# EAGLE board max1551_charger_v1 (EAGLE 8.4.2)
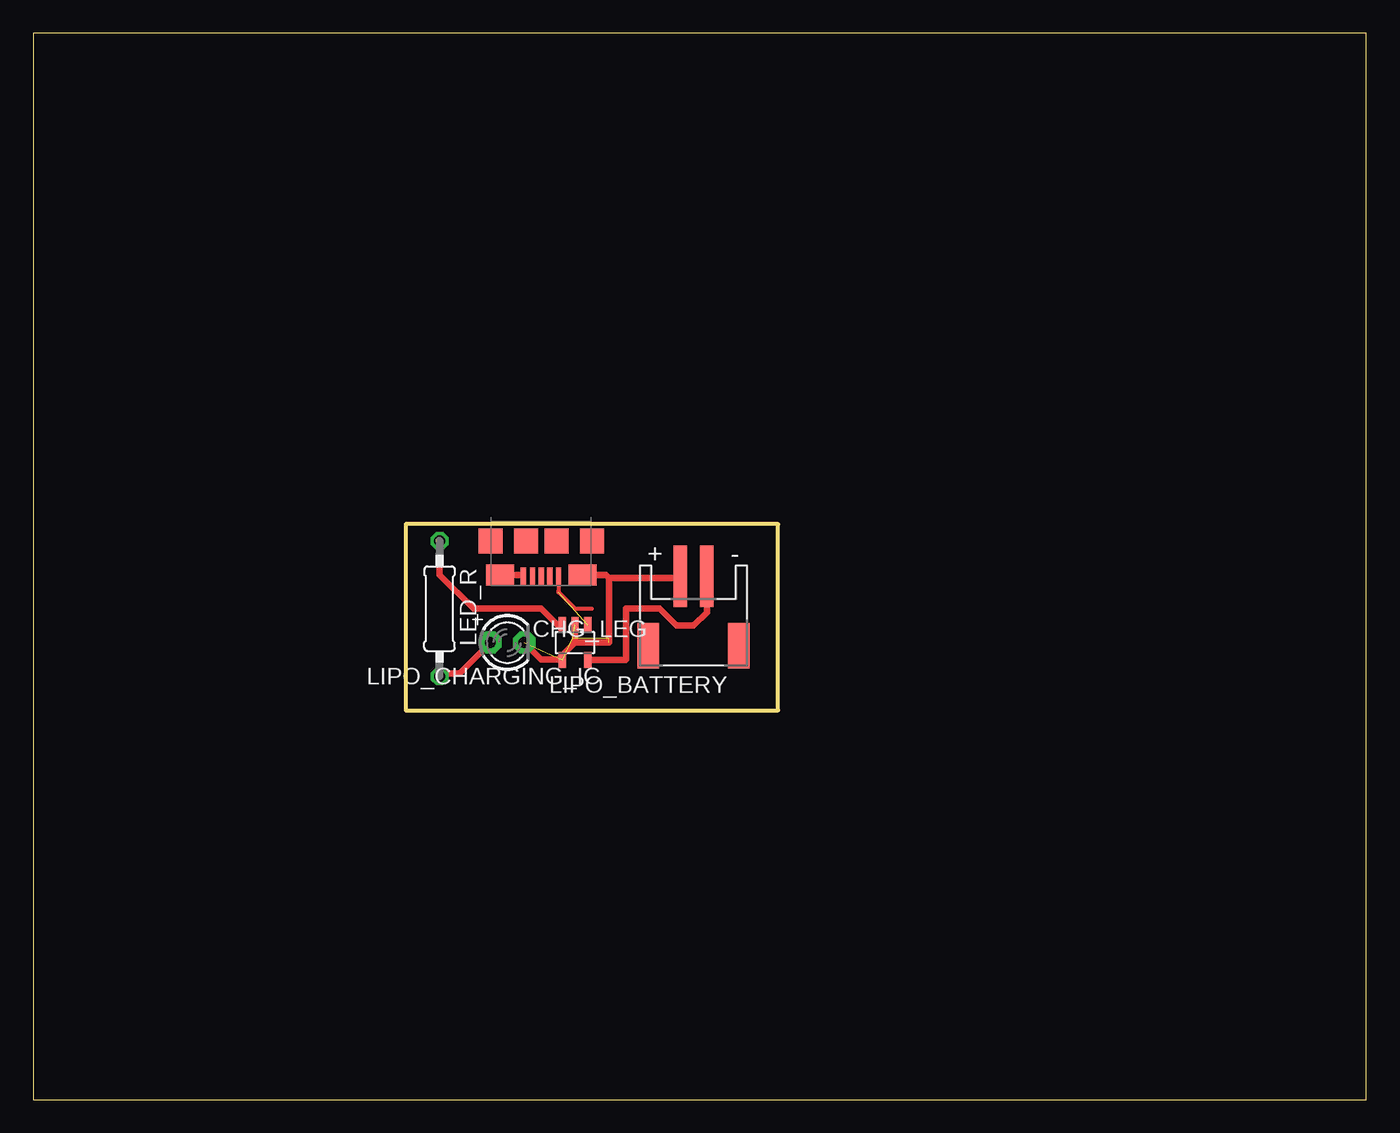
[diagram p0: board, top side]

Size 100 x 80 mm. Coordinates in mm from the lower left corner, seen from the top.
Outline: 0,0 100,0 100,80 0,80 0,0
Outline: 27.94,43.18 27.94,29.21 55.88,29.21 55.88,43.18 27.94,43.18
Copper layers (1*16): Top 0.035mm / dielectric 1.5mm / Bottom 0.035mm
Design rules "default *": minimum track width 0.5mm, minimum drill 0.5mm, track to track 6mil, track to pad 6mil, pad to pad 6mil, via to via 6mil, smd to smd 6mil, copper to edge 40mil, drill to drill 6mil, minimum pad ring 10mil, minimum via ring 8mil, stop-mask expansion 4mil, vias tented up to drill 0mil, thermal gap 10mil

## Footprints (pad centres in the part's own frame; a part is rotated, then mirrored left to right if it is on the bottom)
LED3MM = drill 0.813 pad 1.676 octagon: A -1.27,0; K 1.27,0
0207/10 = drill 0.813 octagon: 1 -5.08,0; 2 5.08,0
JST-PH-2-SMT-RA = smd 1 x 4.6: 1 1,-3.7; 2 -1,-3.7 | smd 1.6 x 3.4: NC1 -3.4,1.5; NC2 3.4,1.5
SOT23-5L = smd 0.55 x 1.2: 1 -0.95,-1.3; 2 0,-1.3; 3 0.95,-1.3; 4 0.95,1.3; 5 -0.95,1.3
FCI-10118192-0001LF = smd 0.4 x 1.35: GND@1 1.35,2.675; NC 0.65,2.675; RX -0.65,2.675; TX 0,2.675; VCC -1.3,2.675 | smd 2.1 x 1.6: GND@2 -3.1,2.55; GND@7 3.1,2.55 | smd 1.8 x 1.9: GND@3 -3.8,0; GND@4 -1.15,0; GND@5 1.15,0; GND@6 3.8,0

## Placement (x,y rotation side)
CHG_LEG  [LED3MM]  35.56,34.29 0 top
LED_R  [0207/10]  30.48,36.83 270 top
LIPO_BATTERY  [JST-PH-2-SMT-RA]  49.53,35.56 180 top
LIPO_CHARGING_IC  MAX1555  [SOT23-5L]  40.64,34.29 180 top
USB_JACK  FCI-10118192-0001LF  [FCI-10118192-0001LF]  38.1,41.91 180 top

## Library data of the parts
CHG_LEG LIPO_BATTERY = adafruit
LED_R = rcl
LIPO_CHARGING_IC = maxim; MF: MAXIM; MPN: MAX1555EZK+T; OC_FARNELL: 1628222; OC_NEWARK: 59J2761
USB_JACK = cmooney

## Nets
BAT_POS: LIPO_BATTERY.2 LIPO_CHARGING_IC.5
CHG_INDICATOR: LED_R.1 LIPO_CHARGING_IC.3
N$1: CHG_LEG.A LED_R.2
N$2: CHG_LEG.K LIPO_BATTERY.1 LIPO_CHARGING_IC.2 LIPO_CHARGING_IC.4 USB_JACK.GND@1 USB_JACK.GND@2 USB_JACK.GND@3 USB_JACK.GND@4 USB_JACK.GND@5 USB_JACK.GND@6 USB_JACK.GND@7
USB_POWER: LIPO_CHARGING_IC.1 USB_JACK.VCC

## Tracks (layer width: path | path; a pad name or v marks a point on that pad's centre or on a via)
BAT_POS
  Top 0.5: LIPO_BATTERY.2 50.53,36.56 49.53,35.56 48.26,35.56 46.99,36.83 44.45,36.83 44.45,33.02 44.42,32.99 LIPO_CHARGING_IC.5
CHG_INDICATOR
  Top 0.5: LIPO_CHARGING_IC.3 39.34,35.59 38.1,36.83 33.02,36.83 30.48,39.37 LED_R.1
N$1
  Top 0.5: CHG_LEG.A 31.97,31.97 30.66,31.97 LED_R.2
N$2  (6 unrouted)
  Top 0.5: 43.18,39.14 48.28,39.14 LIPO_BATTERY.1 | 43.18,39.14 43.18,34.29 41.91,34.29 40.64,34.29 | 43.18,39.14 42.96,39.36 USB_JACK.GND@2 | USB_JACK.GND@7 36.62,39.36 USB_JACK.GND@1 | 40.64,34.29 40.64,35.56 | CHG_LEG.K 38.1,33.02 39.37,33.02 40.64,34.29
USB_POWER  (1 unrouted)
  Top 0.305: USB_JACK.VCC 39.4,38.13 | 39.4,38.13 39.37,38.1 | 39.4,38.13 39.4,38.07 40.64,36.83 41.91,36.83